# EAGLE board rcp2pads (EAGLE 9.5.2)
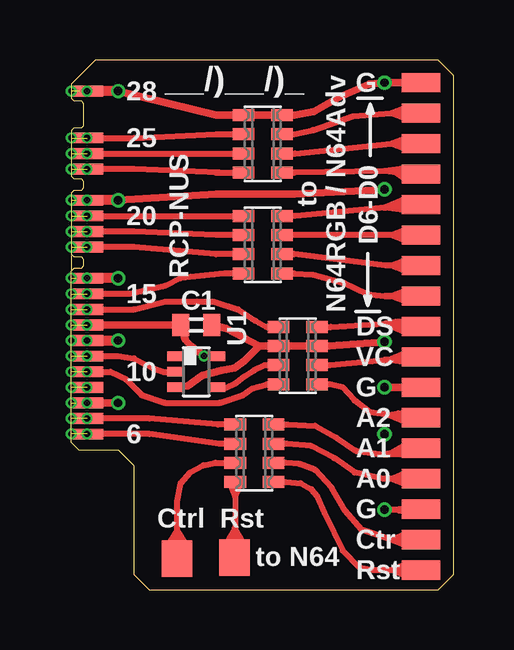
[diagram p0: board, top side]
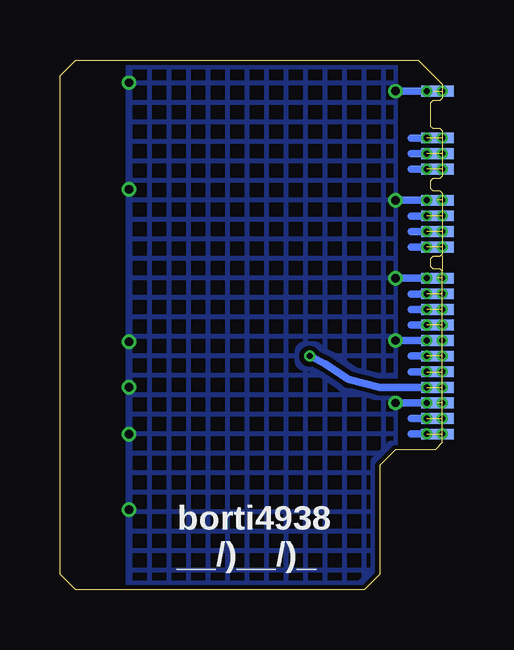
[diagram p1: board, bottom side, seen from below]

Size 15.93 x 22.1 mm. Coordinates in mm from the lower left corner, seen from the top.
Outline: 0,13.3 0.1,13.4 0.4,13.4 0.5,13.5 0.5,13.8 0.4,13.9 0.1,13.9 0,14 0,16.55 0.1,16.65 0.4,16.65 0.5,16.75 0.5,17.05 0.4,17.15 0.1,17.15 0,17.25 0,19.15 0.1,19.25 0.4,19.25 0.5,19.35 0.5,20.3 0.4,20.4 0.1,20.4 0,20.5 0,21.1 1,22.1 15.28,22.1 15.93,21.45 15.93,0.65 15.28,0 3.25,0 2.6,0.65 2.6,5.2 1.95,5.85 0.3,5.85 0,6.15 0,13.3
Outline: 0,13.95 0,13.3
Copper layers (1*16): Top 0.018mm / dielectric 1.55mm / Bottom 0.018mm
Design rules "fpc": minimum track width 0.1mm, minimum drill 0.2mm, track to track 0.2mm, track to pad 0.2mm, pad to pad 0.2mm, via to via 0.2mm, smd to smd 0mil, copper to edge 0.2mm, drill to drill 0.2mm, minimum pad ring 0.125mm, minimum via ring 0.1mm, stop-mask expansion 2mil, vias tented up to drill 1mm, thermal gap 0.2mm

## Footprints (pad centres in the part's own frame; a part is rotated, then mirrored left to right if it is on the bottom)
C0402 = smd 0.7 x 0.9: 1 -0.65,0; 2 0.65,0
SMD0.8SQ = smd 1.27 x 1.524: P$1 0,0
SMD0,45-1,35 = smd 1.35 x 0.45: P$1 0,0
SMD0,8-1,6 = smd 0.8 x 1.6: 1 0,0
CTS742C083 = smd 0.5 x 0.9: 1 -1.2,-0.8; 2 -0.4,-0.8; 3 0.4,-0.8; 4 1.2,-0.8; 5 1.2,0.8; 6 0.4,0.8; 7 -0.4,0.8; 8 -1.2,0.8
DCK_R-PDSO-G5 = smd 0.4 x 0.7: 1 -0.65,-0.85; 2 0,-0.85; 3 0.65,-0.85; 4 0.65,0.85; 5 -0.65,0.85

## Placement (x,y rotation side)
C1  [C0402]  5.2,11.05 0 top
E$2  [SMD0.8SQ]  4.4,1.3 0 top
E$6  [SMD0.8SQ]  6.8,1.35 0 top
E$7  [SMD0,45-1,35]  0.2,11.05 0 bottom
E$8  [SMD0,45-1,35]  0.65,9.75 0 top
E$9  [SMD0,45-1,35]  0.65,10.4 0 top
E$10  [SMD0,45-1,35]  0.65,11.7 0 top
E$11  [SMD0,45-1,35]  0.65,12.35 0 top
E$12  [SMD0,45-1,35]  0.65,13 0 top
E$13  [SMD0,45-1,35]  0.65,14.3 0 top
E$14  [SMD0,45-1,35]  0.65,14.95 0 top
E$15  [SMD0,45-1,35]  0.65,15.6 0 top
E$16  [SMD0,45-1,35]  0.65,16.25 0 top
E$17  [SMD0,45-1,35]  0.65,17.55 0 top
E$18  [SMD0,45-1,35]  0.65,18.2 0 top
E$19  [SMD0,45-1,35]  0.65,18.85 0 top
E$20  [SMD0,8-1,6]  14.56,19.88 90 top
E$21  [SMD0,8-1,6]  14.56,21.15 90 top
E$22  [SMD0,45-1,35]  0.2,18.85 0 bottom
E$23  [SMD0,45-1,35]  0.2,18.2 0 bottom
E$24  [SMD0,45-1,35]  0.2,17.55 0 bottom
E$25  [SMD0,45-1,35]  0.2,16.25 0 bottom
E$26  [SMD0,45-1,35]  0.2,15.6 0 bottom
E$27  [SMD0,45-1,35]  0.2,14.95 0 bottom
E$28  [SMD0,45-1,35]  0.2,14.3 0 bottom
E$29  [SMD0,45-1,35]  0.2,13 0 bottom
E$30  [SMD0,45-1,35]  0.2,12.35 0 bottom
E$31  [SMD0,45-1,35]  0.2,11.7 0 bottom
E$32  [SMD0,45-1,35]  0.2,10.4 0 bottom
E$33  [SMD0,45-1,35]  0.2,9.75 0 bottom
E$34  [SMD0,45-1,35]  0.65,11.05 0 top
E$35  [SMD0,45-1,35]  0.65,8.45 0 top
E$36  [SMD0,8-1,6]  14.56,18.61 90 top
E$37  [SMD0,45-1,35]  0.2,8.45 0 bottom
E$38  [SMD0,45-1,35]  0.65,9.1 0 top
E$39  [SMD0,8-1,6]  14.56,17.34 90 top
E$40  [SMD0,45-1,35]  0.65,7.15 0 top
E$41  [SMD0,45-1,35]  0.65,6.5 0 top
E$43  [SMD0,45-1,35]  0.2,7.8 0 bottom
E$44  [SMD0,45-1,35]  0.2,7.15 0 bottom
E$45  [SMD0,45-1,35]  0.2,6.5 0 bottom
E$46  [SMD0,45-1,35]  0.65,20.8 0 top
E$47  [SMD0,45-1,35]  0.2,20.8 0 bottom
E$48  [SMD0,8-1,6]  14.56,16.07 90 top
E$49  [SMD0,8-1,6]  14.56,14.8 90 top
E$50  [SMD0,8-1,6]  14.56,13.53 90 top
E$51  [SMD0,8-1,6]  14.56,12.26 90 top
E$53  [SMD0,8-1,6]  14.56,10.99 90 top
E$54  [SMD0,8-1,6]  14.56,9.72 90 top
E$55  [SMD0,8-1,6]  14.56,8.45 90 top
E$56  [SMD0,8-1,6]  14.56,7.18 90 top
E$57  [SMD0,8-1,6]  14.56,5.91 90 top
E$58  [SMD0,8-1,6]  14.56,4.64 90 top
E$59  [SMD0,8-1,6]  14.56,3.37 90 top
E$60  [SMD0,8-1,6]  14.56,2.1 90 top
E$61  [SMD0,8-1,6]  14.56,0.83 90 top
GND  [SMD0,45-1,35]  0.65,7.8 0 top
LRCLK  [SMD0,45-1,35]  0.2,9.1 0 bottom
RN1  CAY16-330J4LF  [CTS742C083]  7.97,18.6 270 top
RN2  CAY16-330J4LF  [CTS742C083]  7.97,14.4 270 top
RN3  CAY16-330J4LF  [CTS742C083]  9.43,9.78 270 top
RN4  CAY16-330J4LF  [CTS742C083]  7.62,5.7 90 top
U1  SN74LVC1G17DCKR  [DCK_R-PDSO-G5]  5.2,9.1 270 top

## Library data of the parts
C1 = rcl
E$2 E$6-E$41 E$43-E$51 E$53-E$61 GND LRCLK = wirepad
RN1-RN4 = resistor-net
U1 = 74xx-little-de

## Nets
#DSYNC: E$10.P$1 E$31.P$1 RN3.1
#DSYNC.1: E$53.1 RN3.8
CTRL: E$2.P$1 RN4.7
CTRL.1: E$60.1 RN4.2
D0: E$19.P$1 E$22.P$1 RN1.2
D0.1: E$20.1 RN1.7
D1: E$18.P$1 E$23.P$1 RN1.3
D1.1: E$36.1 RN1.6
D2: E$17.P$1 E$24.P$1 RN1.4
D2.1: E$39.1 RN1.5
D3: E$15.P$1 E$26.P$1 RN2.1
D3.1: E$48.1 RN2.8
D4: E$14.P$1 E$27.P$1 RN2.2
D4.1: E$49.1 RN2.7
D5: E$13.P$1 E$28.P$1 RN2.3
D5.1: E$50.1 RN2.6
D6: E$11.P$1 E$30.P$1 RN2.4
D6.1: E$51.1 RN2.5
GND: C1.2 E$9.P$1 E$12.P$1 E$16.P$1 E$21.1 E$25.P$1 E$29.P$1 E$32.P$1 E$43.P$1 E$46.P$1 E$55.1 E$59.1 GND.P$1 RN1.1 RN1.8 RN3.2 RN3.7 U1.3
LRCLK: E$38.P$1 RN3.4
LRCLK.1: E$56.1 RN3.5
RST: E$6.P$1 RN4.8
RST.1: E$61.1 RN4.1
SCLK: E$41.P$1 RN4.6
SCLK.1: E$58.1 RN4.3
SDATA: E$40.P$1 RN4.5
SDATA.1: E$57.1 RN4.4
VCC: C1.1 E$7.P$1 E$34.P$1 E$35.P$1 E$37.P$1 U1.5
VCLK: E$8.P$1 E$33.P$1 U1.2
VCLK.1: E$54.1 RN3.6
VCLK_BUF: RN3.3 U1.4

## Tracks (layer width: path | path; a pad name or v marks a point on that pad's centre or on a via)
#DSYNC  (via drill 0.25)  (2 unrouted)
  Top 0.254: E$10.P$1 2.6,11.7 3.9,12.03 5.92,12.03 6.95,11.7 7.67,11.22 8.12,10.97 RN3.1
  Bottom 0.305: E$31.P$1 1.3,11.7
  other vias: 0.65,11.7 0,11.7
#DSYNC.1
  Top 0.254: E$53.1 13.65,11.07 13.13,11.12 13.63,11.19 | RN3.8 10.82,10.97 13.08,11.12 13.97,10.74 13.97,11.24 13.63,11.19 | 13.21,11.12 13.63,11.19
CTRL
  Top 0.254: E$2.P$1 4.4,2.5 | 4.4,2.5 3.9,1.7 | 4.9,1.7 4.4,2.5 | 4.4,2.5 4.4,3.7 4.55,4.45 4.95,4.9 5.5,5.2 6,5.3 RN4.7
CTRL.1
  Top 0.254: E$60.1 13.34,2.1 | RN4.2 8.93,5.3 9.5,5.25 10.15,5 10.85,4.25 11.4,3.3 12.1,2.5 13.34,2.1 | 13.34,2.1 13.97,2.35 13.97,1.85 13.34,2.1
D0  (via drill 0.25)  (2 unrouted)
  Top 0.254: E$19.P$1 2.6,18.85 6.03,19 RN1.2
  Bottom 0.305: E$22.P$1 1.3,18.85
  other vias: 0.65,18.85 0,18.85
D0.1
  Top 0.254: E$20.1 13.46,19.88 | 13.46,19.88 13.34,19.88 | RN1.7 9.28,19 10.07,19.18 11.72,19.75 13.34,19.88 | 13.46,19.88 13.97,20.13 | 13.97,19.63 13.46,19.88 | 13.34,19.88 13.97,20.13 | 13.97,20.13 13.97,19.63 | 13.97,19.63 13.34,19.88
D1  (via drill 0.25)  (2 unrouted)
  Top 0.254: E$18.P$1 RN1.3
  Bottom 0.305: E$23.P$1 1.3,18.2
  other vias: 0.65,18.2 0,18.2
D1.1
  Top 0.254: E$36.1 13.46,18.61 | 13.46,18.61 13.34,18.61 | RN1.6 9.32,18.2 13.34,18.61 | 13.46,18.61 13.97,18.86 | 13.97,18.36 13.46,18.61 | 13.34,18.61 13.97,18.86 | 13.97,18.86 13.97,18.36 | 13.97,18.36 13.34,18.61
D2  (via drill 0.25)  (2 unrouted)
  Top 0.254: E$17.P$1 2.6,17.55 6.17,17.4 | 6.03,17.4 6.17,17.4 | 6.17,17.4 RN1.4
  Bottom 0.305: E$24.P$1 1.3,17.55
  other vias: 0.65,17.55 0,17.55
D2.1
  Top 0.254: RN1.5 9.28,17.4 13.08,17.47 | 13.54,17.41 13.08,17.47 | 13.54,17.41 13.97,17.09 13.97,17.59 13.08,17.47 | 13.04,17.47 13.64,17.42 E$39.1 13.54,17.41
D3  (via drill 0.25)  (2 unrouted)
  Top 0.254: E$15.P$1 RN2.1
  Bottom 0.305: E$26.P$1 1.3,15.6
  other vias: 0.65,15.6 0,15.6
D3.1
  Top 0.254: 13.03,15.94 E$48.1 | 13.03,15.94 13.02,15.94 13.08,15.94 | RN2.8 9.32,15.6 13.08,15.94 | 13.08,15.94 13.97,16.32 13.97,15.82 13.08,15.94 | 13.03,15.94
D4  (via drill 0.25)  (2 unrouted)
  Top 0.254: E$14.P$1 2.6,14.95 6.03,14.8 RN2.2
  Bottom 0.305: E$27.P$1 1.3,14.95
  other vias: 0.65,14.95 0,14.95
D4.1
  Top 0.254: E$49.1 13.34,14.8 | 13.34,14.8 13.97,15.05 13.97,14.55 13.34,14.8 | 13.34,14.8 RN2.7
D5  (via drill 0.25)  (2 unrouted)
  Top 0.254: E$13.P$1 2.6,14.3 6.03,14 RN2.3
  Bottom 0.305: E$28.P$1 1.3,14.3
  other vias: 0.65,14.3 0,14.3
D5.1
  Top 0.254: E$50.1 13.34,13.53 | 13.34,13.53 13.08,13.53 9.28,14 RN2.6 | 13.34,13.53 13.97,13.78 13.97,13.28 13.34,13.53
D6  (via drill 0.25)  (2 unrouted)
  Top 0.254: E$11.P$1 2.45,12.35 3.9,12.68 4.55,13 6.38,13.2 RN2.4
  Bottom 0.305: E$30.P$1 1.3,12.35
  other vias: 0.65,12.35 0,12.35
D6.1
  Top 0.254: RN2.5 9.28,13.2 10.05,13.15 11.35,12.8 12.3,12.35 13.06,12.26 | 13.3,12.25 13.06,12.26 | 13.06,12.26 13.34,12.26 | 13.34,12.26 E$51.1 | 13.34,12.26 13.97,12.51 13.97,12.01 13.34,12.26
GND  (via drill 0.25, 0.35)  (4 unrouted)
  Top 0.254: E$46.P$1 0.33,20.8 | 0.33,10.4 E$9.P$1 v0,10.4 | 13.65,3.35 v13.05,3.35 13.08,3.37
  Top 0.305: 7.83,10.18 RN3.2 RN3.7 10.72,10.18 v13.05,10.35 | E$21.1 v13.05,21.15 12.4,21.1 11.15,20.55 10.1,19.95 9.28,19.8 RN1.8 RN1.1 6.03,19.8 v1.95,20.8 | v13.05,8.45 E$55.1 | 14.56,3.35 13.65,3.35 | v1.95,16.25 6.03,16.5 9.28,16.5 v13.05,16.7 | C1.2 6.45,10.9 7.83,10.18 | GND.P$1 v1.95,7.8 | U1.3 4.85,8.5 5.45,8.95 6.25,9.15 6.8,9.25 7.2,9.55 7.83,10.18
  Top 0.406: E$9.P$1 v1.95,10.4 | v1.95,20.8 E$46.P$1 | E$59.1 14.56,3.35 | v1.95,16.25 E$16.P$1 | v1.95,13 E$12.P$1
  Bottom 0.305: E$46.P$1 v1.95,20.8 | E$25.P$1 v1.95,16.25 | E$29.P$1 v1.95,13 | E$32.P$1 v1.95,10.4 | E$43.P$1 v1.95,7.8
  other vias: 0,20.8 0.65,10.4 0.65,7.8 0,7.8 0.65,20.8 13.05,6.5 0.65,16.25 0,16.25 0.65,13 0,13
  pour Bottom (hatched): 13.07,0.05 13.07,22.48 1.95,22.43 1.95,0
LRCLK  (via drill 0.25)  (1 unrouted)
  Top 0.254: E$38.P$1 1.62,9.1 2.27,8.78 2.92,8.12 3.9,7.8 6.17,7.8 7.15,8.12 7.54,8.39 8.15,8.57 RN3.4
  Bottom 0.305: E$38.P$1 1.3,9.1
  other vias: 0.65,9.1 0,9.1
LRCLK.1
  Top 0.254: E$56.1 13.19,7.31 | RN3.5 10.78,8.57 11.3,8.45 11.8,7.9 12.45,7.4 13.19,7.31 | 13.62,7.37 13.21,7.31 14.1,6.93 14.1,7.43 13.62,7.37 | 13.19,7.31 13.62,7.37
RST
  Top 0.203: 6.83,2.58 6.8,2.55
  Top 0.254: 6.8,2.55 E$6.P$1 | 6.8,2.55 7.3,1.7 | 6.8,2.55 6.3,1.7 | RN4.8 6.83,3.9 | 6.58,4.5 6.83,3.9 | 6.83,3.9 7.08,4.5 | 6.83,3.9 6.83,2.58
RST.1
  Top 0.254: 13.34,0.83 E$61.1 | RN4.1 8.93,4.5 9.55,4.45 10,4.2 10.25,3.9 10.55,3.2 11.3,1.65 12,0.95 12.55,0.85 13.34,0.83 | 13.34,0.83 13.97,1.08 13.97,0.58 13.34,0.83
SCLK  (via drill 0.25)  (1 unrouted)
  Top 0.254: E$41.P$1 3.25,6.5 6.15,6.1 RN4.6
  Bottom 0.305: E$41.P$1 1.3,6.5
  other vias: 0.65,6.5 0,6.5
SCLK.1
  Top 0.254: E$58.1 13.34,4.64 | 13.34,4.64 12.98,4.64 11.8,4.9 10.95,5.5 10,6 8.97,6.1 RN4.3 | 13.34,4.64 13.97,4.89 13.97,4.39 13.34,4.64
SDATA  (via drill 0.25)  (1 unrouted)
  Top 0.254: E$40.P$1 3.25,7.15 6.1,6.9 RN4.5
  Bottom 0.305: E$40.P$1 1.3,7.15
  other vias: 0,7.15 0.65,7.15
SDATA.1
  Top 0.254: E$57.1 13.03,5.66 | 13.03,5.66 13.01,5.66 11.85,5.8 11.05,6.35 10.15,6.85 9.03,6.9 RN4.4 | 13.21,5.66 14.1,6.16 14.1,5.66 13.21,5.66 | 13.03,5.66 13.21,5.66
VCC  (via drill 0.25)  (4 unrouted)
  Top 0.305: E$34.P$1 C1.1 4.75,10.45 4.95,10.2 v5.53,9.75 U1.5
  Bottom 0.305: E$37.P$1 2.6,8.45 3.9,8.78 4.88,9.43 v5.53,9.75 | E$7.P$1 1.3,11.05
  other vias: 0.65,8.45 0,8.45 0.65,11.05 0,11.05
VCLK  (via drill 0.25)  (2 unrouted)
  Top 0.254: U1.2 3.8,9.1 3.42,9.22 3.12,9.38 2.6,9.65 1.95,9.75 E$8.P$1
  Bottom 0.305: E$33.P$1 1.3,9.75
  other vias: 0.65,9.75 0,9.75
VCLK.1
  Top 0.254: E$54.1 13.66,9.64 13.02,9.59 | RN3.6 10.78,9.38 13.02,9.59 | 13.21,9.59 14.1,9.97 14.1,9.47 13.21,9.59 | 13.21,9.59 13.02,9.59
VCLK_BUF
  Top 0.254: RN3.3 8.07,9.38 7.6,9.15 7.2,8.9 6.8,8.6 6.5,8.45 U1.4

## Text on the board
tPlace: 28 | G | 25 | to / N64RGB / N64Adv | RCP-NUS | D6-D0 | 20 | 15 | DS | VC | 10 | G | A2 | 6 | A1 | A0 | Ctrl | Rst | G | Ctr | to N64 | Rst
tNames: __/)__/)_
bNames: borti4938 / __/)__/)_